# EAGLE board 08D-005-A1-01 (EAGLE 9.6.2)
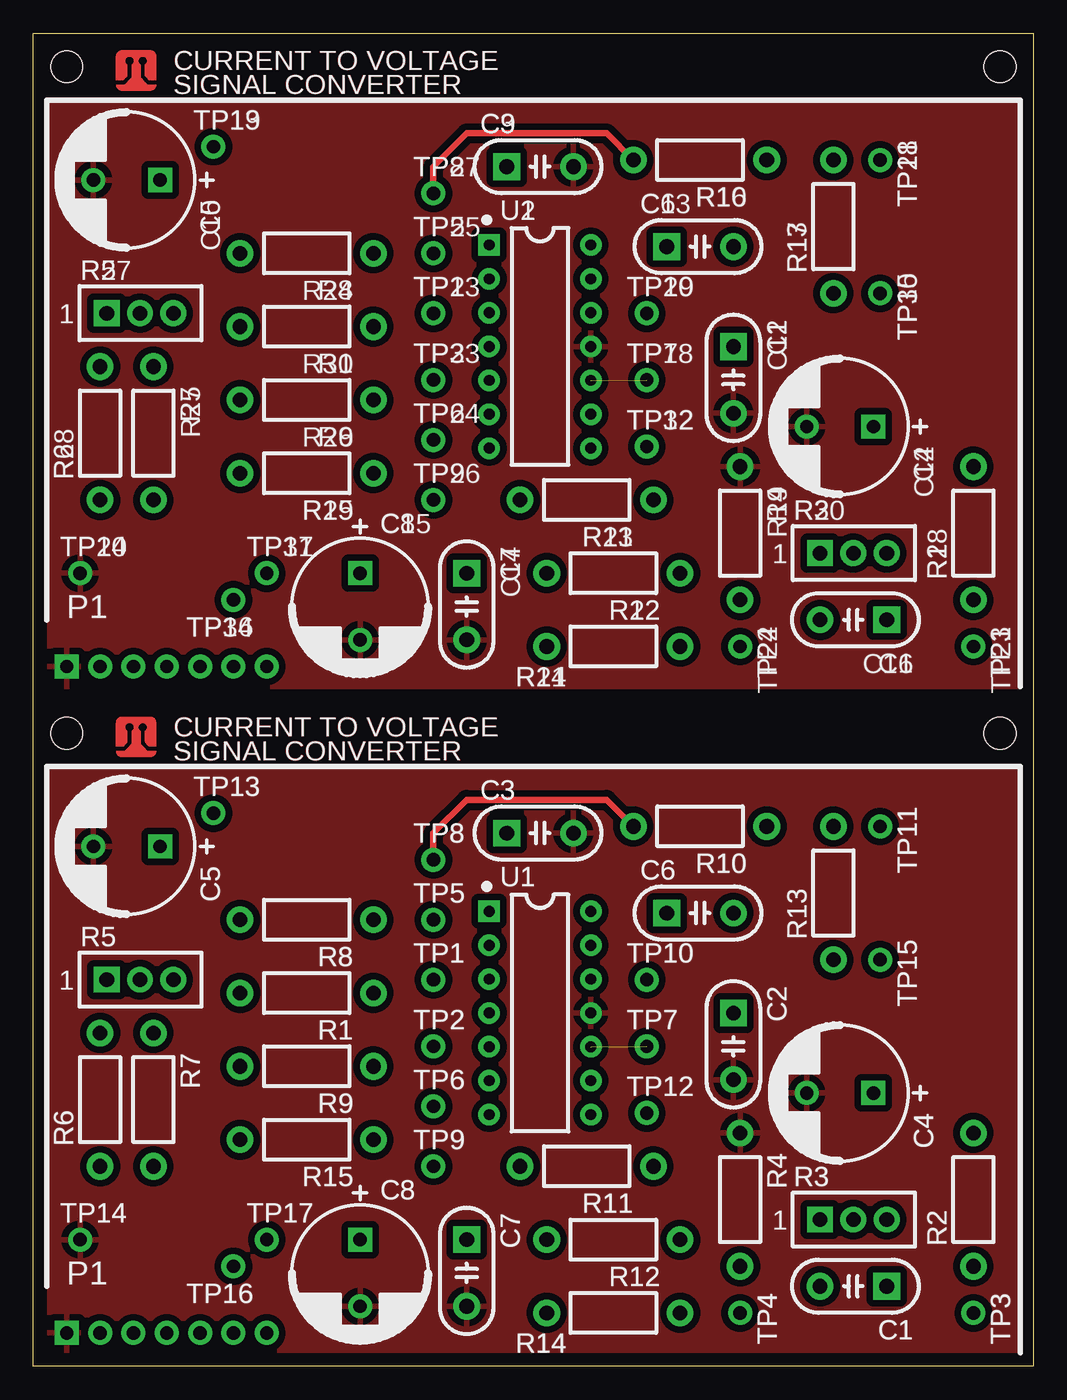
[diagram p0: board, top side]
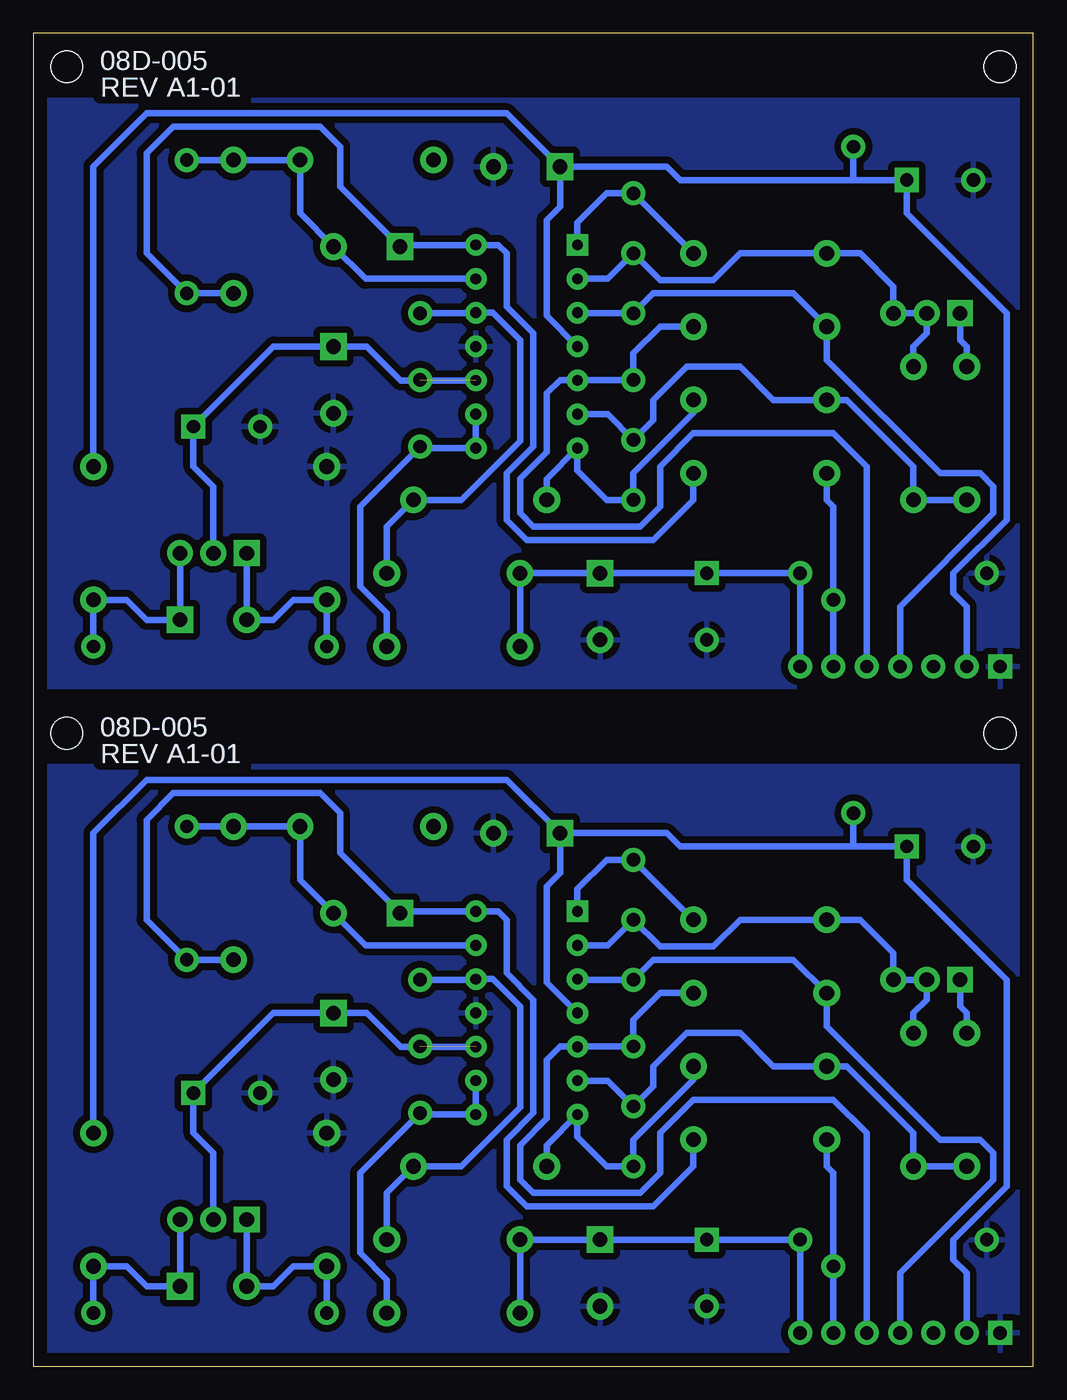
[diagram p1: board, bottom side, seen from below]

Size 75 x 100 mm. Coordinates in mm from the lower left corner, seen from the top.
Outline: 0,0 0,100 75,100 75,0 0,0
Copper layers (1*16): Top 0.035mm / dielectric 1.5mm / Bottom 0.035mm
Design rules "minipcb-THD": minimum track width 0.5mm, minimum drill 0.5mm, track to track 0.5mm, track to pad 0.5mm, pad to pad 0.5mm, via to via 0.5mm, smd to smd 0mil, copper to edge 1mm, drill to drill 1mm, minimum pad ring 0.4mm, minimum via ring 0.4mm, stop-mask expansion 0.1mm, vias tented up to drill 0.6mm, thermal gap 0.5mm

## Footprints (pad centres in the part's own frame; a part is rotated, then mirrored left to right if it is on the bottom)
C050-024X044 = drill 1.1 pad 2 square: 1 -2.5,0 | drill 1.1 pad 2: 2 2.5,0
C5MM = drill 1 square: + -2.5,0 | drill 1: - 2.5,0
PINS_1X7 = drill 1 square: 1 0,0 | drill 1: 2 2.5,0; 3 5,0; 4 7.5,0; 5 10,0; 6 12.5,0; 7 15,0
MINIPCB_0P_50X75 = hole 2.4: 72.5,47.5; 2.5,47.5
0207/10 = drill 1.1 pad 2: 1 -5,0; 2 5,0
TRIM_0100 = drill 1.1 pad 1.93 square: 1 0,0 | drill 1.1 pad 1.93: 2 2.5,0; 3 5,0
PINS_1_TESTPOINT_KE5000_NOTEXT = drill 1: 1 0,0
DIL14 = drill 0.813 square: 1 -7.62,-3.81 | drill 0.813: 2 -5.08,-3.81; 3 -2.54,-3.81; 4 0,-3.81; 5 2.54,-3.81; 6 5.08,-3.81; 7 7.62,-3.81; 8 7.62,3.81; 9 5.08,3.81; 10 2.54,3.81; 11 0,3.81; 12 -2.54,3.81; 13 -5.08,3.81; 14 -7.62,3.81

## Placement (x,y rotation side)
C1  [C050-024X044]  61.5,6 180 top
C2  [C050-024X044]  52.5,24 270 top
C3  [C050-024X044]  38,40 0 top
C4  [C5MM]  60.5,20.5 180 top
C5  [C5MM]  7,39 180 top
C6  [C050-024X044]  50,34 0 top
C7  [C050-024X044]  32.5,7 270 top
C8  [C5MM]  24.5,7 270 top
C9  [C050-024X044]  38,90 0 top
C10  [C5MM]  7,89 180 top
C11  [C050-024X044]  52.5,74 270 top
C12  [C5MM]  60.5,70.5 180 top
C13  [C050-024X044]  50,84 0 top
C14  [C050-024X044]  32.5,57 270 top
C15  [C5MM]  24.5,57 270 top
C16  [C050-024X044]  61.5,56 180 top
E$1  [MINIPCB_PANEL_IMAGEFRAME]  -35,-30 0 top  (outside the outline)
P1  [PINS_1X7]  2.5,2.5 0 top
P2  [PINS_1X7]  2.5,52.5 0 top
PCB1  [MINIPCB_0P_50X75]  0,0 0 top
PCB2  [MINIPCB_0P_50X75]  0,50 0 top
R1  [0207/10]  20.5,28 180 top
R2  [0207/10]  70.5,12.5 90 top
R3  [TRIM_0100]  59,11 0 top
R4  [0207/10]  53,12.5 270 top
R5  [TRIM_0100]  5.5,29 0 top
R6  [0207/10]  5,20 90 top
R7  [0207/10]  9,20 270 top
R8  [0207/10]  20.5,33.5 180 top
R9  [0207/10]  20.5,22.5 180 top
R10  [0207/10]  50,40.5 180 top
R11  [0207/10]  41.5,15 180 top
R12  [0207/10]  43.5,9.5 180 top
R13  [0207/10]  60,35.5 90 top
R14  [0207/10]  43.5,4 180 top
R15  [0207/10]  20.5,17 180 top
R16  [0207/10]  50,90.5 180 top
R17  [0207/10]  60,85.5 90 top
R18  [0207/10]  70.5,62.5 90 top
R19  [0207/10]  53,62.5 270 top
R20  [TRIM_0100]  59,61 0 top
R21  [0207/10]  43.5,54 180 top
R22  [0207/10]  43.5,59.5 180 top
R23  [0207/10]  41.5,65 180 top
R24  [0207/10]  20.5,83.5 180 top
R25  [0207/10]  9,70 270 top
R26  [0207/10]  20.5,72.5 180 top
R27  [TRIM_0100]  5.5,79 0 top
R28  [0207/10]  5,70 90 top
R29  [0207/10]  20.5,67 180 top
R30  [0207/10]  20.5,78 180 top
TP1  [PINS_1_TESTPOINT_KE5000_NOTEXT]  30,29 0 top
TP2  [PINS_1_TESTPOINT_KE5000_NOTEXT]  30,24 0 top
TP3  [PINS_1_TESTPOINT_KE5000_NOTEXT]  70.5,4 270 top
TP4  [PINS_1_TESTPOINT_KE5000_NOTEXT]  53,4 270 top
TP5  [PINS_1_TESTPOINT_KE5000_NOTEXT]  30,33.5 0 top
TP6  [PINS_1_TESTPOINT_KE5000_NOTEXT]  30,19.5 0 top
TP7  [PINS_1_TESTPOINT_KE5000_NOTEXT]  46,24 0 top
TP8  [PINS_1_TESTPOINT_KE5000_NOTEXT]  30,38 0 top
TP9  [PINS_1_TESTPOINT_KE5000_NOTEXT]  30,15 0 top
TP10  [PINS_1_TESTPOINT_KE5000_NOTEXT]  46,29 0 top
TP11  [PINS_1_TESTPOINT_KE5000_NOTEXT]  63.5,40.5 270 top
TP12  [PINS_1_TESTPOINT_KE5000_NOTEXT]  46,19 0 top
TP13  [PINS_1_TESTPOINT_KE5000_NOTEXT]  13.5,41.5 0 top
TP14  [PINS_1_TESTPOINT_KE5000_NOTEXT]  3.5,9.5 0 top
TP15  [PINS_1_TESTPOINT_KE5000_NOTEXT]  63.5,30.5 270 top
TP16  [PINS_1_TESTPOINT_KE5000_NOTEXT]  15,7.5 180 top
TP17  [PINS_1_TESTPOINT_KE5000_NOTEXT]  17.5,9.5 0 top
TP18  [PINS_1_TESTPOINT_KE5000_NOTEXT]  46,74 0 top
TP19  [PINS_1_TESTPOINT_KE5000_NOTEXT]  13.5,91.5 0 top
TP20  [PINS_1_TESTPOINT_KE5000_NOTEXT]  3.5,59.5 0 top
TP21  [PINS_1_TESTPOINT_KE5000_NOTEXT]  70.5,54 270 top
TP22  [PINS_1_TESTPOINT_KE5000_NOTEXT]  53,54 270 top
TP23  [PINS_1_TESTPOINT_KE5000_NOTEXT]  30,79 0 top
TP24  [PINS_1_TESTPOINT_KE5000_NOTEXT]  30,69.5 0 top
TP25  [PINS_1_TESTPOINT_KE5000_NOTEXT]  30,83.5 0 top
TP26  [PINS_1_TESTPOINT_KE5000_NOTEXT]  30,65 0 top
TP27  [PINS_1_TESTPOINT_KE5000_NOTEXT]  30,88 0 top
TP28  [PINS_1_TESTPOINT_KE5000_NOTEXT]  63.5,90.5 270 top
TP29  [PINS_1_TESTPOINT_KE5000_NOTEXT]  46,79 0 top
TP30  [PINS_1_TESTPOINT_KE5000_NOTEXT]  63.5,80.5 270 top
TP31  [PINS_1_TESTPOINT_KE5000_NOTEXT]  17.5,59.5 0 top
TP32  [PINS_1_TESTPOINT_KE5000_NOTEXT]  46,69 0 top
TP33  [PINS_1_TESTPOINT_KE5000_NOTEXT]  30,74 0 top
TP34  [PINS_1_TESTPOINT_KE5000_NOTEXT]  15,57.5 180 top
U1  [DIL14]  38,26.5 270 top
U2  [DIL14]  38,76.5 270 top

## Library data of the parts
C1-C16 E$1 P1 P2 R1-R30 TP1-TP34 U1 U2 = minipcb
PCB1 PCB2 = minipcb; CIRCUIT_CATEGORY: SIGNAL CONVERTER; PART_NUMBER: 08D-005; REVISION: A1-01; TITLE: CURRENT TO VOLTAGE

## Nets
BIAS: C2.1 C4.+ R3.2 TP7.1 U1.10
BIAS1: C11.1 C12.+ R20.2 TP18.1 U2.10
GND: C2.2 C3.2 C4.- C5.- C7.2 C8.- P1.1 R4.1 TP14.1 U1.11
GND1: C9.2 C10.- C11.2 C12.- C14.2 C15.- P2.1 R19.1 TP20.1 U2.11
N$1: R11.1 R12.1 TP10.1 U1.12
N$2: C7.1 C8.+ P1.7 R12.2 R14.2 TP17.1
N$3: P1.5 R1.1 TP2.1 U1.5
N$4: P1.4 R1.2 TP1.1 U1.3
N$5: R5.2 R5.3 R7.1 R8.2 TP5.1 U1.2
N$6: R6.1 R7.2 R9.2 TP6.1 U1.6
N$7: R8.1 R10.2 TP8.1 U1.1
N$8: R9.1 R11.2 TP9.1 U1.7
N$9: R14.1 TP12.1 U1.8 U1.9
N$10: R5.1 R6.2
N$11: P1.6 R15.2 TP16.1
N$12: R22.1 R23.1 TP29.1 U2.12
N$13: C14.1 C15.+ P2.7 R21.2 R22.2 TP31.1
N$14: P2.5 R30.1 TP33.1 U2.5
N$15: P2.4 R30.2 TP23.1 U2.3
N$16: R24.2 R25.1 R27.2 R27.3 TP25.1 U2.2
N$17: R25.2 R26.2 R28.1 TP24.1 U2.6
N$18: R16.2 R24.1 TP27.1 U2.1
N$19: R23.2 R26.1 TP26.1 U2.7
N$20: R21.1 TP32.1 U2.8 U2.9
N$21: R27.1 R28.2
N$22: P2.6 R29.2 TP34.1
NC: P1.3
NC1: P2.3
OUT: C6.1 R13.1 R15.1 TP15.1 U1.14
OUT1: C13.1 R17.1 R29.1 TP30.1 U2.14
POT.1: C1.2 R3.1 R4.2 TP4.1
POT.2: C16.1 R18.1 R20.3 TP21.1
POT.3: C1.1 R2.1 R3.3 TP3.1
POT.4: C16.2 R19.2 R20.1 TP22.1
V+: C3.1 C5.+ P1.2 R2.2 TP13.1 U1.4
V+1: C9.1 C10.+ P2.2 R18.2 TP19.1 U2.4
VFB: C6.2 R10.1 R13.2 TP11.1 U1.13
VFB1: C13.2 R16.1 R17.2 TP28.1 U2.13

## Tracks (layer width: path | path; a pad name or v marks a point on that pad's centre or on a via)
BIAS  (1 unrouted)
  Bottom 0.5: R3.2 61.5,16 63,17.5 C4.+ 57,26.5 C2.1 50,26.5 47.46,23.96 U1.10
BIAS1  (1 unrouted)
  Bottom 0.5: R20.2 61.5,66 63,67.5 C12.+ 57,76.5 C11.1 50,76.5 47.46,73.96 U2.10
GND
  pour Bottom: 1,1 74,1 74,45 1,45
  pour Top: 1,1 74,1 74,45 1,45
GND1
  pour Bottom: 1,51 74,51 74,95 1,95
  pour Top: 1,51 74,51 74,95 1,95
N$1
  Bottom 0.5: TP10.1 41.85,29 U1.12 40.54,29.04 38.5,27 38.5,19.41 42.91,15 R11.1 48.5,13 R12.1
N$2
  Bottom 0.5: R14.2 R12.2 C7.1 C8.+ TP17.1 P1.7
N$3
  Bottom 0.5: R1.1 28,28 30,26 TP2.1 34.15,24 | 34.15,24 U1.5 | P1.5 12.5,17.5 15,20 25.5,20 28,17.5 28,14.5 29.5,13 37.5,13 38.5,14 38.5,16.59 36.5,18.59 36.5,23 35.5,24 34.15,24
N$4
  Bottom 0.5: P1.4 10,7 3,14 3,16 4,17 7,17 15.5,25.5 R1.2 18,30.5 28.5,30.5 TP1.1 34.15,29 U1.3
N$5
  Bottom 0.5: R7.1 9,26.5 8,27.5 R5.2 R5.3 10.5,31 13,33.5 R8.2 22,33.5 24,31.5 28,31.5 TP5.1 31.92,31.58 U1.2
N$6
  Bottom 0.5: R6.1 R7.2 9,17.5 14,22.5 R9.2 19.5,22.5 22,25 26,25 28.5,22.5 28.5,21 TP6.1 31.92,21.42 U1.6
N$7
  Top 0.5: TP8.1 30,40 32.5,42.5 43,42.5 R10.2
  Bottom 0.5: R8.1 TP8.1 32,38 34.19,35.81 U1.1
N$8
  Bottom 0.5: R9.1 25.5,21.5 30,17 TP9.1 32,15 34.19,17.19 U1.7 36.5,16.57 R11.2
N$9
  Bottom 0.5: U1.9 U1.8 45.88,18.88 TP12.1 50.5,14.5 50.5,8.5 48.5,6.5 R14.1
N$10
  Bottom 0.5: R6.2 5,26.5 5.5,27 R5.1
N$11
  Bottom 0.5: P1.6 TP16.1 15,14.5 15.5,15 R15.2
N$12
  Bottom 0.5: TP29.1 41.85,79 U2.12 40.54,79.04 38.5,77 38.5,69.41 42.91,65 R23.1 48.5,63 R22.1
N$13
  Bottom 0.5: R21.2 R22.2 C14.1 C15.+ TP31.1 P2.7
N$14
  Bottom 0.5: R30.1 28,78 30,76 TP33.1 34.15,74 | 34.15,74 U2.5 | P2.5 12.5,67.5 15,70 25.5,70 28,67.5 28,64.5 29.5,63 37.5,63 38.5,64 38.5,66.59 36.5,68.59 36.5,73 35.5,74 34.15,74
N$15
  Bottom 0.5: P2.4 10,57 3,64 3,66 4,67 7,67 15.5,75.5 R30.2 18,80.5 28.5,80.5 TP23.1 34.15,79 U2.3
N$16
  Bottom 0.5: R25.1 9,76.5 8,77.5 R27.2 R27.3 10.5,81 13,83.5 R24.2 22,83.5 24,81.5 28,81.5 TP25.1 31.92,81.58 U2.2
N$17
  Bottom 0.5: R28.1 R25.2 9,67.5 14,72.5 R26.2 19.5,72.5 22,75 26,75 28.5,72.5 28.5,71 TP24.1 31.92,71.42 U2.6
N$18
  Top 0.5: TP27.1 30,90 32.5,92.5 43,92.5 R16.2
  Bottom 0.5: R24.1 TP27.1 32,88 34.19,85.81 U2.1
N$19
  Bottom 0.5: R26.1 25.5,71.5 30,67 TP26.1 32,65 34.19,67.19 U2.7 36.5,66.57 R23.2
N$20
  Bottom 0.5: U2.9 U2.8 45.88,68.88 TP32.1 50.5,64.5 50.5,58.5 48.5,56.5 R21.1
N$21
  Bottom 0.5: R28.2 5,76.5 5.5,77 R27.1
N$22
  Bottom 0.5: P2.6 TP34.1 15,64.5 15.5,65 R29.2
OUT
  Bottom 0.5: R15.1 25.5,15 28.5,12 38,12 39.5,13.5 39.5,17 37.5,19 37.5,27.5 39.5,29.5 39.5,33.5 40.12,34.12 U1.14 47.38,34.12 C6.1 52,38.5 52,41.5 53.5,43 64.5,43 66.5,41 66.5,33.5 TP15.1 R13.1
OUT1
  Bottom 0.5: R29.1 25.5,65 28.5,62 38,62 39.5,63.5 39.5,67 37.5,69 37.5,77.5 39.5,79.5 39.5,83.5 40.12,84.12 U2.14 47.38,84.12 C13.1 52,88.5 52,91.5 53.5,93 64.5,93 66.5,91 66.5,83.5 TP30.1 R17.1
POT.1
  Bottom 0.5: R3.1 C1.2 57,6 55.5,7.5 R4.2 TP4.1
POT.2
  Bottom 0.5: TP21.1 R18.1 68,57.5 66.5,56 C16.1 R20.3
POT.3
  Bottom 0.5: TP3.1 R2.1 68,7.5 66.5,6 C1.1 R3.3
POT.4
  Bottom 0.5: R20.1 C16.2 57,56 55.5,57.5 R19.2 TP22.1
V+
  Bottom 0.5: P1.2 5,7 6,8 6,9.5 2,13.5 2,29 9.5,36.5 C5.+ 13.5,39 | 13.5,39 26.5,39 27.5,40 C3.1 | TP13.1 13.5,39 | U1.4 36.5,28.81 36.5,36 35.5,37 C3.1 | C3.1 39.5,44 66.5,44 70.5,40 R2.2
V+1
  Bottom 0.5: P2.2 5,57 6,58 6,59.5 2,63.5 2,79 9.5,86.5 C10.+ 13.5,89 | 13.5,89 26.5,89 27.5,90 C9.1 | TP19.1 13.5,89 | U2.4 36.5,78.81 36.5,86 35.5,87 C9.1 | C9.1 39.5,94 66.5,94 70.5,90 R18.2
VFB
  Bottom 0.5: TP11.1 R13.2 R10.1 55,36.5 C6.2 50.08,31.58 U1.13
VFB1
  Bottom 0.5: TP28.1 R17.2 R16.1 55,86.5 C13.2 50.08,81.58 U2.13

## Text on the board
_tNames: TP13 | C3 | TP11 | TP8 | C5 | R10 | C6 | U1 | TP5 | R13 | TP15 | R5 | R8 | TP1 | TP10 | C2 | R1 | TP2 | TP7 | R7 | R9 | TP6 | TP12 | C4 | R6 | TP9 | R4 | R15 | R11 | R3 | C8 | C7 | TP14 | TP17 | R2 | R12 | TP16 | TP4 | TP3 | C1 | R14 | TP13 | C3 | TP11 | TP8 | C5 | R10 | C6 | U1 | TP5 | R13 | TP15 | R5 | R8 | TP1 | TP10 | C2 | R1 | TP2 | TP7 | R7 | R9 | TP6 | TP12 | C4 | R6 | TP9 | R4 | R15 | R11 | R3 | C8 | C7 | TP14 | TP17 | R2 | R12 | TP16 | TP4 | TP3 | C1 | R14